# Altium PCB 24.067_HEAT.PcbDoc
Units mm, origin at the board's own origin, x right, y up, seen from the top; angles counter-clockwise.
Board outline 64.5 x 64 mm, 2 copper layers (Top Layer, Bottom Layer); 3 components, 16 nets, 33 pads, 8 vias.
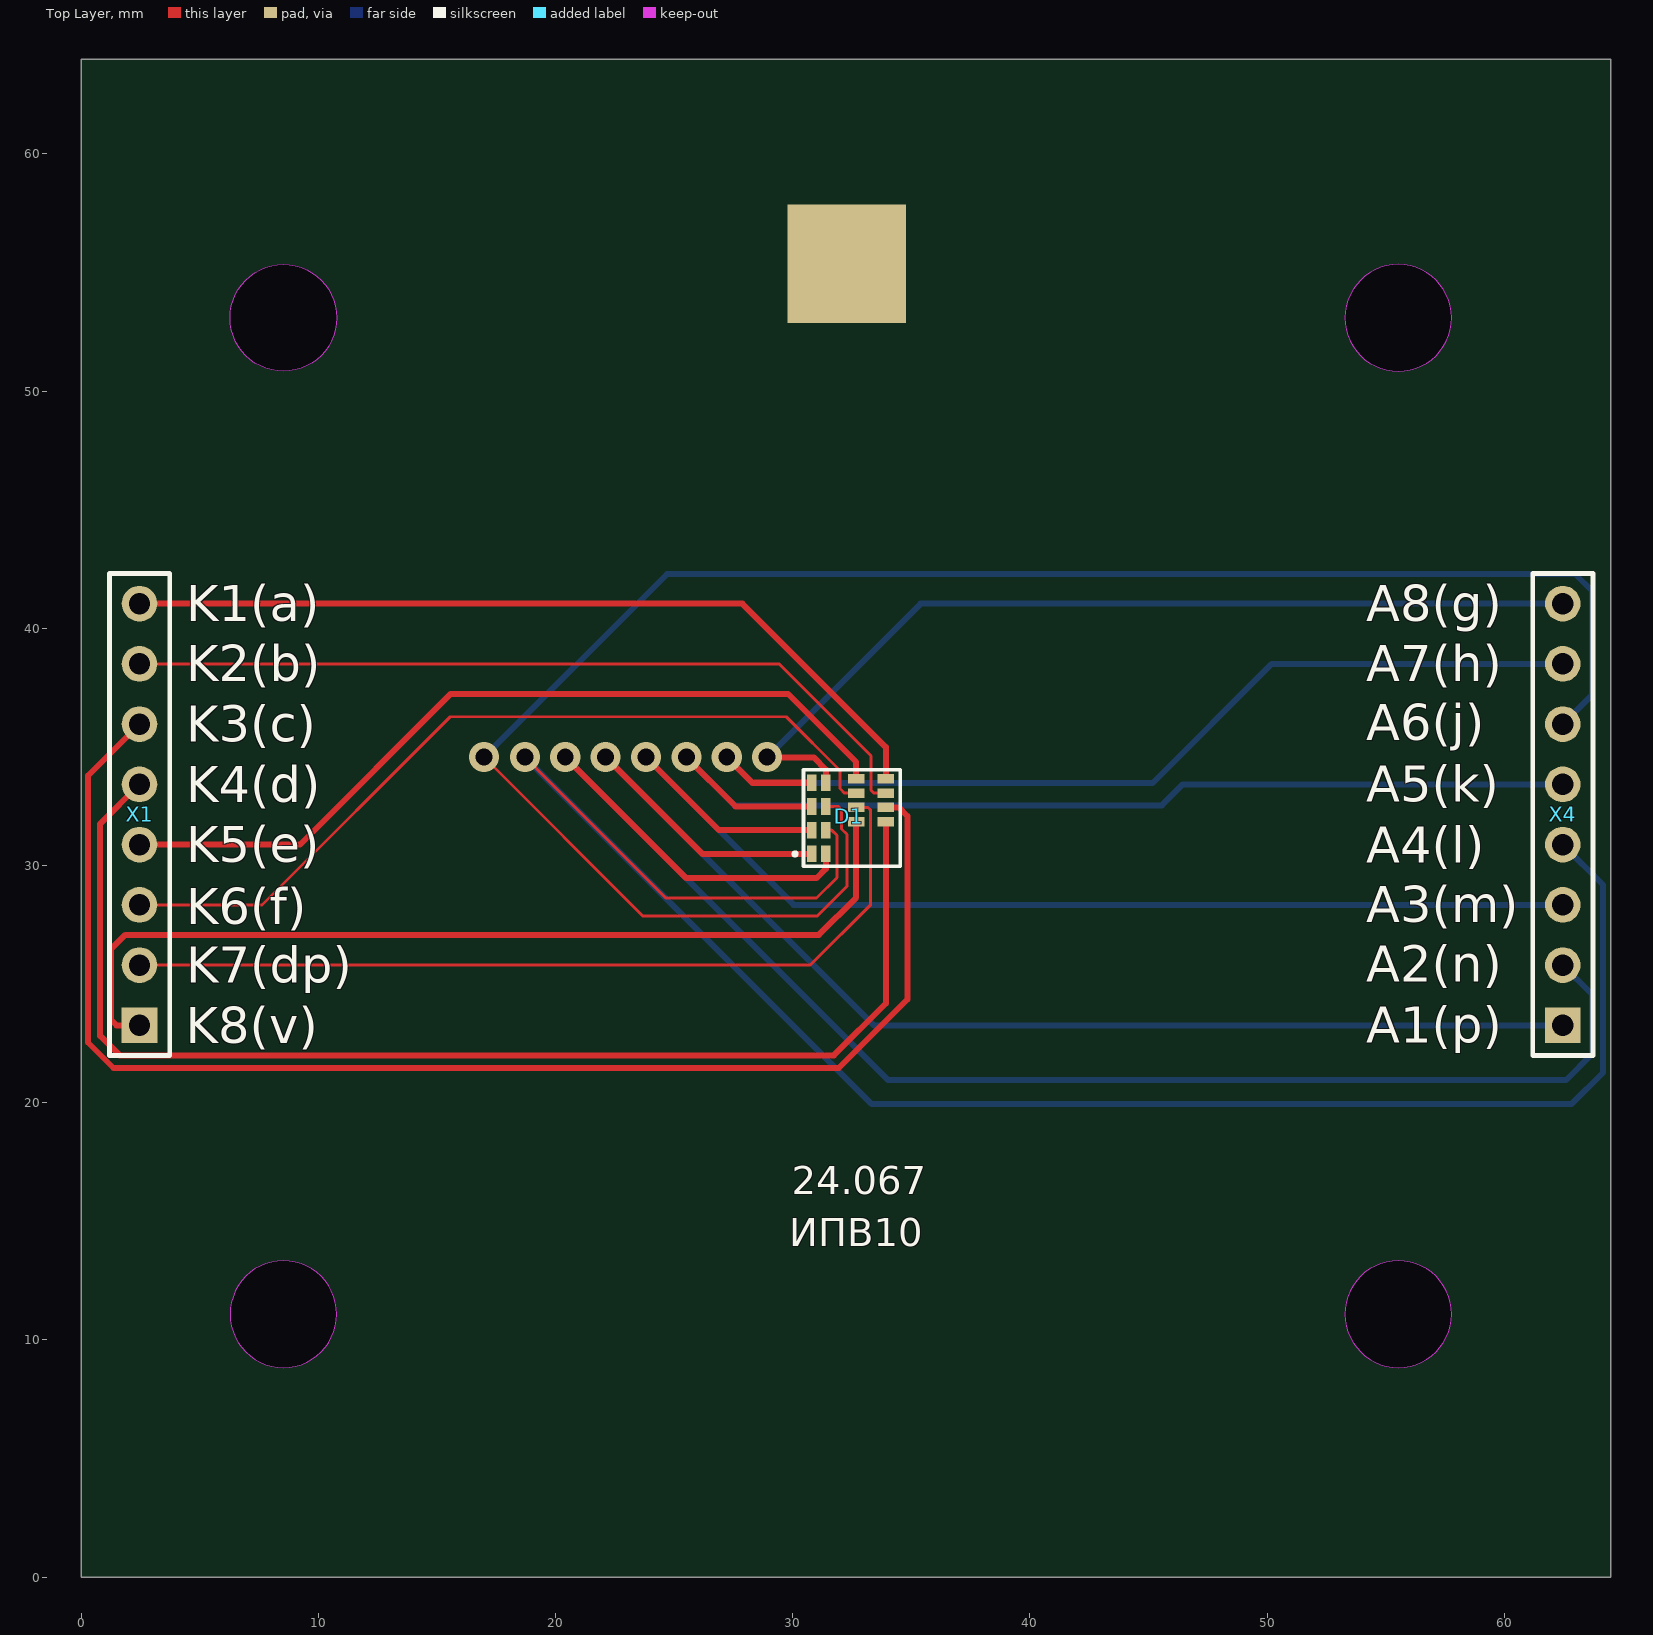
[diagram p0: Top Layer view]
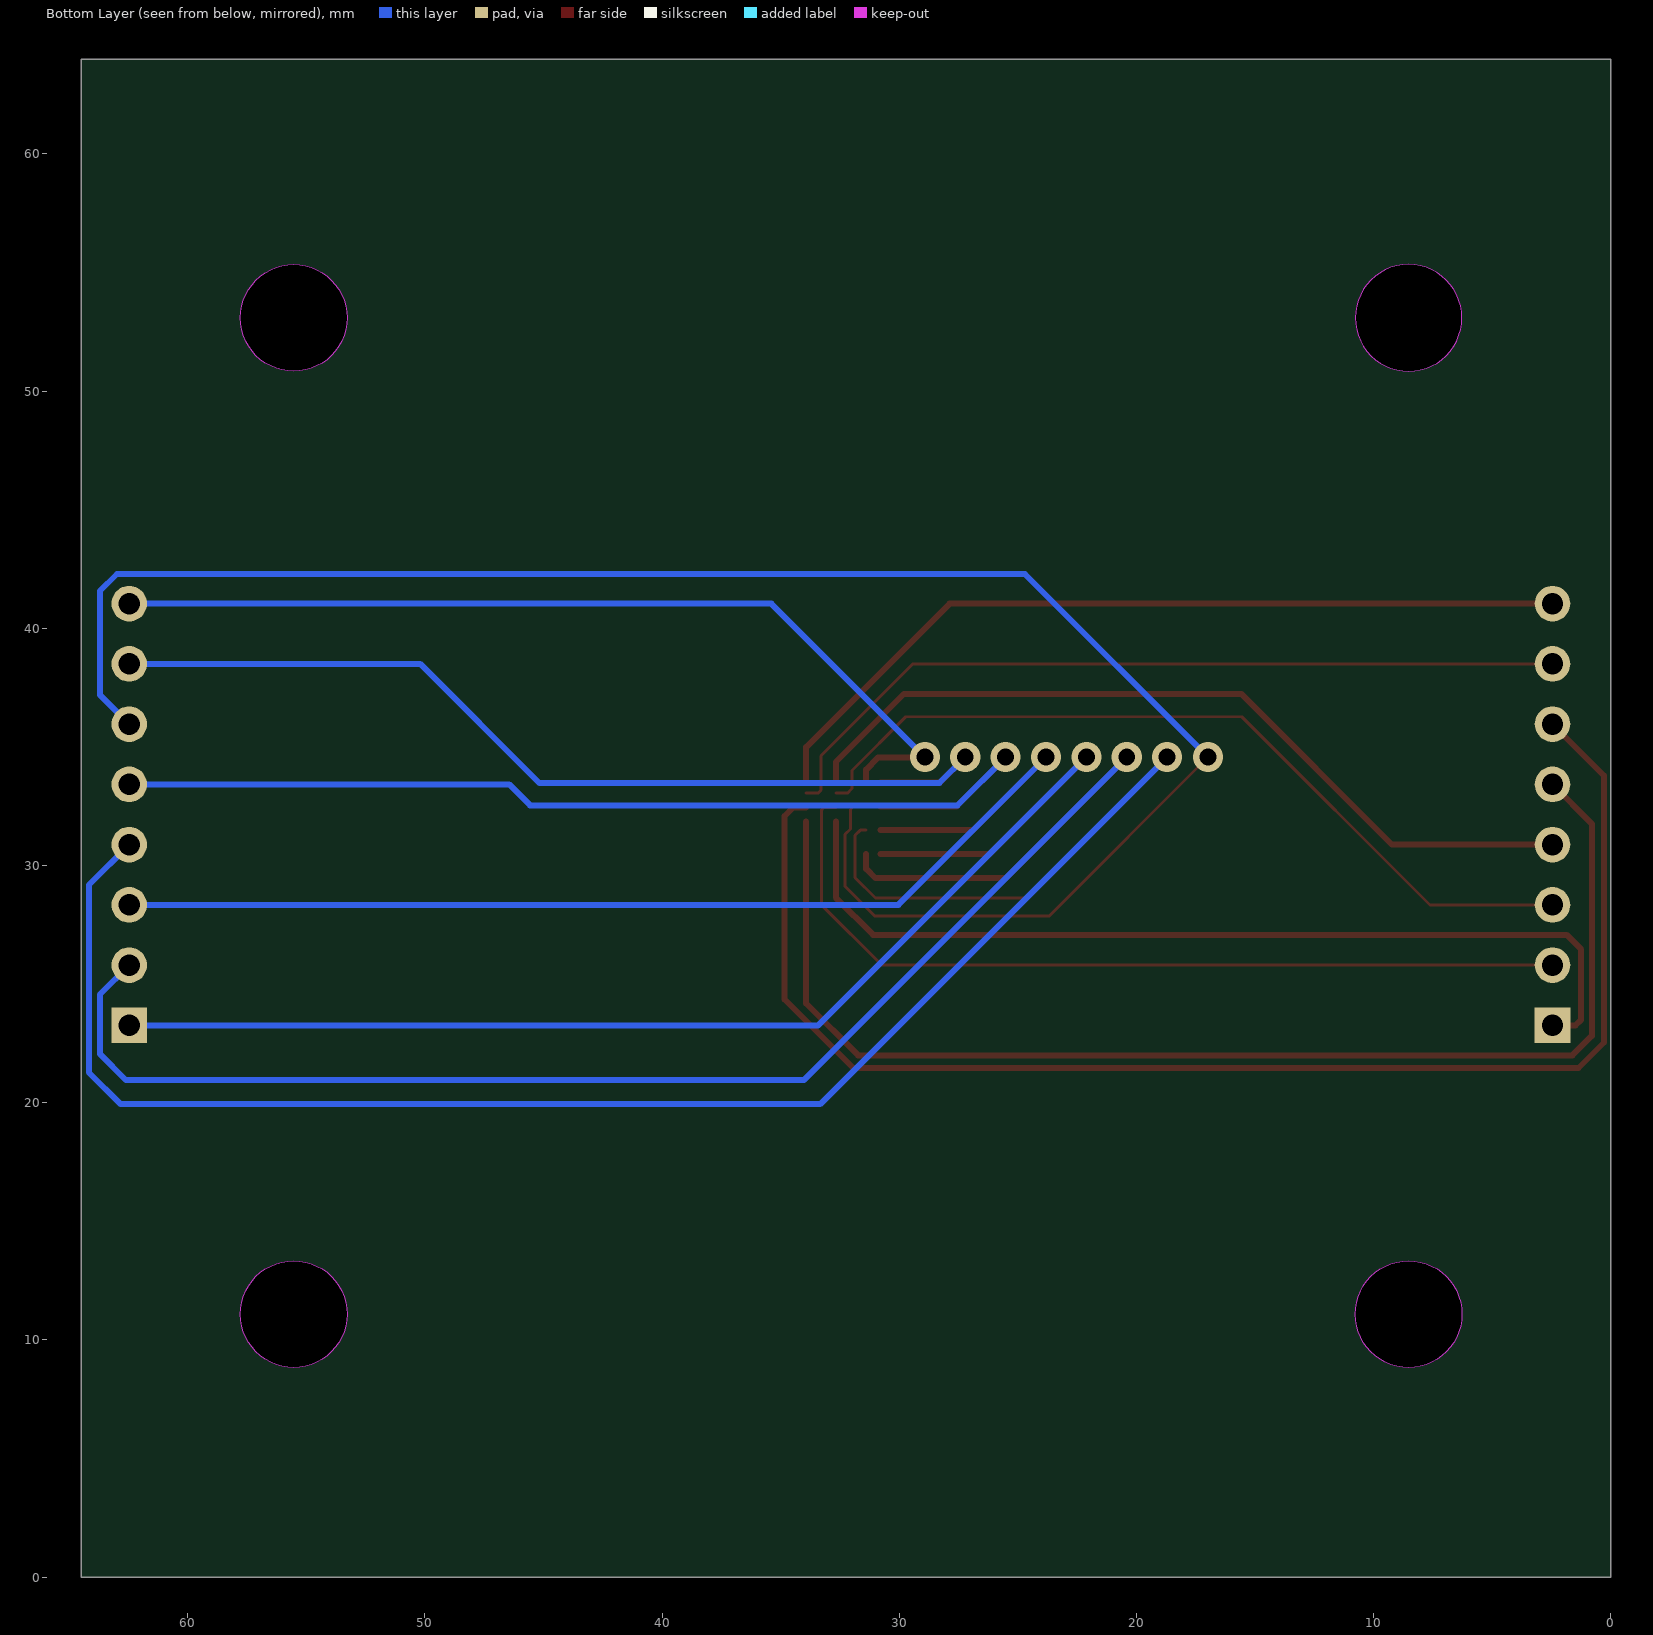
[diagram p1: Bottom Layer view, seen from below]

## Layer stack, top to bottom
Top Solder: solder mask 0.0102, Solder Resist, Dk 3.5
Top Layer: signal copper 0.0356
Dielectric 1: dielectric 0.32, FR-4, Dk 4.8
Bottom Layer: signal copper 0.0356
Bottom Solder: solder mask 0.0102, Solder Resist, Dk 3.5

## Board outline
64.5,0 64.5,64 0,64 0,0
cut-out: 6.282,11.087 ccw(c8.532,11.087) 8.532,8.837 ccw(c8.532,11.087) 10.782,11.087 ccw(c8.532,11.087) 8.532,13.337 ccw(c8.532,11.087)
cut-out: 53.282,11.087 ccw(c55.532,11.087) 55.532,8.837 ccw(c55.532,11.087) 57.782,11.087 ccw(c55.532,11.087) 55.532,13.337 ccw(c55.532,11.087)
cut-out: 53.282,53.087 ccw(c55.532,53.087) 55.532,50.837 ccw(c55.532,53.087) 57.782,53.087 ccw(c55.532,53.087) 55.532,55.337 ccw(c55.532,53.087)
cut-out: 8.532,50.837 cw(c8.532,53.087) 6.282,53.087 cw(c8.532,53.087) 8.532,55.337 cw(c8.532,53.087) 10.782,53.087 cw(c8.532,53.087)

## Design rules (kind name [scope] priority, off if disabled: settings)
Clearance [All] p1: gap=0.254 ignorepadtopadclearanceinfootprint=FALSE except(0: Arc-Hole Track-Hole SMDPad-Hole THPad-Hole Via-Hole Fill-Hole Poly-Hole Region-Hole Text-Hole; 0.2: Arc-Arc Arc-Track Arc-SMDPad Arc-THPad Track-Track Track-SMDPad Track-THPad SMDPad-SMDPad SMDPad-THPad THPad-THPad)
PolygonConnect [All] p1: connectstyle=Relief reliefconductorwidth=0.254 reliefentries=4 polygonreliefangle="90 Angle" airgapwidth=0.254
RoutingVias [All] p1: holewidth=0.711 width=1.27 viastyle="Through Hole" minholewidth=0.711 minwidth=1.27 maxholewidth=0.711 maxwidth=1.27
SolderMaskExpansion [All] p1: expansion=0.102
Width [All] p1: maxlimit=0.254 minlimit=0.125 preferedwidth=0.254
30 further rules are at their usual default settings.

## Components (designator, comment, footprint, x,y, rotation, side; value= is the part's Value field where it differs from the comment)
D1 "LED_8x8" LED_8x8 30.803,30.489 r0 top
X1 "Header 8" HDR1X8 2.468,23.261 r90 top
X4 "Header 8" HDR1X8 62.468,23.261 r90 top

## Footprints (in the part's own frame and the unit in brackets; to place one, negate y for a bottom-side part, rotate by r counter-clockwise, add the part's x,y. Pads: shape width x height; smd on the part's side, far side on the other; paste and mask are expansions set on the pad)
HDR1X8 [mm] "Connector; Header; 8 Position"
  rect 1.5x1.5 hole 0.9: 1(0,0)
  round 1.5 hole 0.9: 2(2.54,0) 3(5.08,0) 4(7.62,0) 5(10.16,0) 6(12.7,0) 7(15.24,0) 8(17.78,0)
  silkscreen extent -1.27,-1.27 19.05,1.27
LED_8x8 [mm] "24.067"
  rect 0.4x0.7 smd: 1(0,0) 2(0.6,0) 3(0,1) 4(0.6,1) 5(0,2) 6(0.6,2) 7(0,3) 8(0.6,3)
  rect 0.7x0.4 smd: 9(3.125,3.159) 10(3.125,2.559) 11(3.125,1.959) 12(3.125,1.359) 13(1.875,3.159) 14(1.875,2.559) 15(1.875,1.959) 16(1.875,1.359)
  silkscreen extent -0.72,-0.52 3.72,3.55

## Part data
X1 X4: "Header, 8-Pin", LatestRevisionDate=17-Jul-2002, LatestRevisionNote="Re-released for DXP Platform.", Publisher="Altium Limited"

## Free pads (board coordinates)
  rect 5x5 smd: 0(32.283,55.372)

## Via types
v1: diameter 1.27, hole 0.711, Top Layer to Bottom Layer, 8 vias

## Nets (pads, with @x,y where several pads share a name; then routed paths per layer and width w, separated by ;. In a path a pad name is that pad's centre, name@x,y a point inside that pad or via, vN(x,y) a via of type N, cw(c..) or ccw(c..) an arc to the next point about the centre after c; other vN are vias at no path point)
A1: D1.1 X4.1 | length 55.4
  Top Layer w0.254: v1(22.115,34.569) 26.196,30.489 D1.1
  Bottom Layer w0.254: v1(22.115,34.569) 33.424,23.261 X4.1
A2: D1.2 X4.2 | length 67.5
  Top Layer w0.254: v1(20.414,34.569) 25.519,29.464 31.005,29.464 31.403,29.861 D1.2
  Bottom Layer w0.254: v1(20.414,34.569) 34.028,20.955 62.603,20.955 63.707,22.059 63.707,24.561 X4.2
A3: D1.3 X4.3 | length 49.5
  Top Layer w0.254: v1(23.817,34.569) 26.898,31.489 D1.3
  Bottom Layer w0.254: v1(23.817,34.569) 30.046,28.341 X4.3
A4: D1.4 X4.4 | length 80.7
  Top Layer w0.125: v1(18.712,34.569) 24.655,28.626 31.005,28.626 31.865,29.486 31.865,31.271 31.648,31.489 D1.4
  Bottom Layer w0.254: v1(18.712,34.569) 33.342,19.939 62.832,19.939 64.161,21.268 64.161,29.187 X4.4
A5: D1.5 X4.5 | length 44.3
  Top Layer w0.254: v1(25.519,34.569) 27.6,32.489 D1.5
  Bottom Layer w0.254: v1(25.519,34.569) 27.551,32.537 45.568,32.537 46.451,33.421 X4.5
A6: D1.6 X4.6 | length 79
  Top Layer w0.125: v1(16.985,34.569) 23.69,27.864 31.031,27.864 32.288,29.121 32.288,31.316 32.065,31.539 32.065,32.36 31.936,32.489 D1.6
  Bottom Layer w0.254: v1(16.985,34.569) 24.706,42.291 62.984,42.291 63.703,41.572 63.703,37.196 X4.6
A7: D1.7 X4.7 | length 41.8
  Top Layer w0.254: v1(27.221,34.569) 28.302,33.489 D1.7
  Bottom Layer w0.254: v1(27.221,34.569) 28.313,33.477 45.179,33.477 50.202,38.501 X4.7
A8: D1.8 X4.8 | length 39.5
  Top Layer w0.254: v1@28.923,34.544 30.904,34.544 31.403,34.045 D1.8
  Bottom Layer w0.254: v1(28.923,34.569) 35.394,41.041 X4.8
K1: D1.9 X1.8 | length 35.3
  Top Layer w0.254: X1.8 27.879,41.041 33.928,34.992 D1.9
K2: D1.10 X1.7 | length 34.6
  Top Layer w0.125: X1.7 29.428,38.501 33.305,34.624 33.305,33.176 33.434,33.048 D1.10
K3: D1.11 X1.6 | length 59.3
  Top Layer w0.254: X1.6 0.297,33.79 0.297,22.538 1.372,21.463 31.945,21.463 34.841,24.359 34.841,32.08 34.473,32.448 D1.11
K4: D1.12 X1.5 | length 53.3
  Top Layer w0.254: X1.5 0.805,31.758 0.805,22.817 1.626,21.996 31.742,21.996 33.928,24.182 D1.12
K5: D1.13 X1.4 | length 34.7
  Top Layer w0.254: X1.4 9.232,30.881 15.588,37.236 29.804,37.236 32.678,34.362 D1.13
K6: D1.14 X1.3 | length 35.3
  Top Layer w0.125: X1.3 7.632,28.341 15.562,36.271 29.727,36.271 31.992,34.007 31.992,33.245 32.189,33.048 D1.14
K7: D1.15 X1.2 | length 36.5
  Top Layer w0.125: X1.2 30.746,25.801 33.291,28.346 33.291,32.333 33.177,32.448 D1.15
K8: D1.16 X1.1 | length 39.8
  Top Layer w0.254: X1.1 1.496,23.261 1.262,23.495 1.262,26.467 1.872,27.076 31.107,27.076 32.678,28.647 D1.16

## Silkscreen, mask and mechanical layers (free items; w line width, h text height)
Top Overlay:
  text "K1(a)" at 4.44,40.304 h1.52
  text "A8(g)" at 54.186,40.304 h1.52
  text "K2(b)" at 4.44,37.764 h1.52
  text "A7(h)" at 54.186,37.764 h1.52
  text "A6(j)" at 54.186,35.275 h1.52
  text "K3(c)" at 4.44,35.224 h1.52
  text "A5(k)" at 54.186,32.684 h1.52
  text "K4(d)" at 4.44,32.659 h1.52
  text "K5(e)" at 4.44,30.144 h1.52
  text "A4(l)" at 54.186,30.119 h1.52
  text "A3(m)" at 54.186,27.604 h1.52
  text "K6(f)" at 4.44,27.528 h1.52
  text "A2(n)" at 54.186,25.089 h1.52
  text "K7(dp)" at 4.44,25.064 h1.52
  text "A1(p)" at 54.186,22.524 h1.52
  text "K8(v)" at 4.421,22.505 h1.52
  text "24.067" at 29.953,15.748 h2.03
  text "ИПВ10" at 29.853,13.548 h2.03
Mechanical 1:
  circle w0.254: c55.532,53.087 r2.25
  circle w0.254: c55.532,11.087 r2.25
  circle w0.254: c8.532,11.087 r2.25
  circle w0.254: c8.532,53.087 r2.25
  lines w0.254: 0,0 0,64 64.5,64 64.5,0 0,0